# Altium PCB PCB1.PcbDoc
Units mil, origin at the board's own origin, x right, y up, seen from the top; angles counter-clockwise.
Board outline 6000 x 4000 mil, 2 copper layers (Top Layer, Bottom Layer); 59 components, 41 nets, 216 pads, 9 vias.
Unrouted connection lines stored in the file: 120.
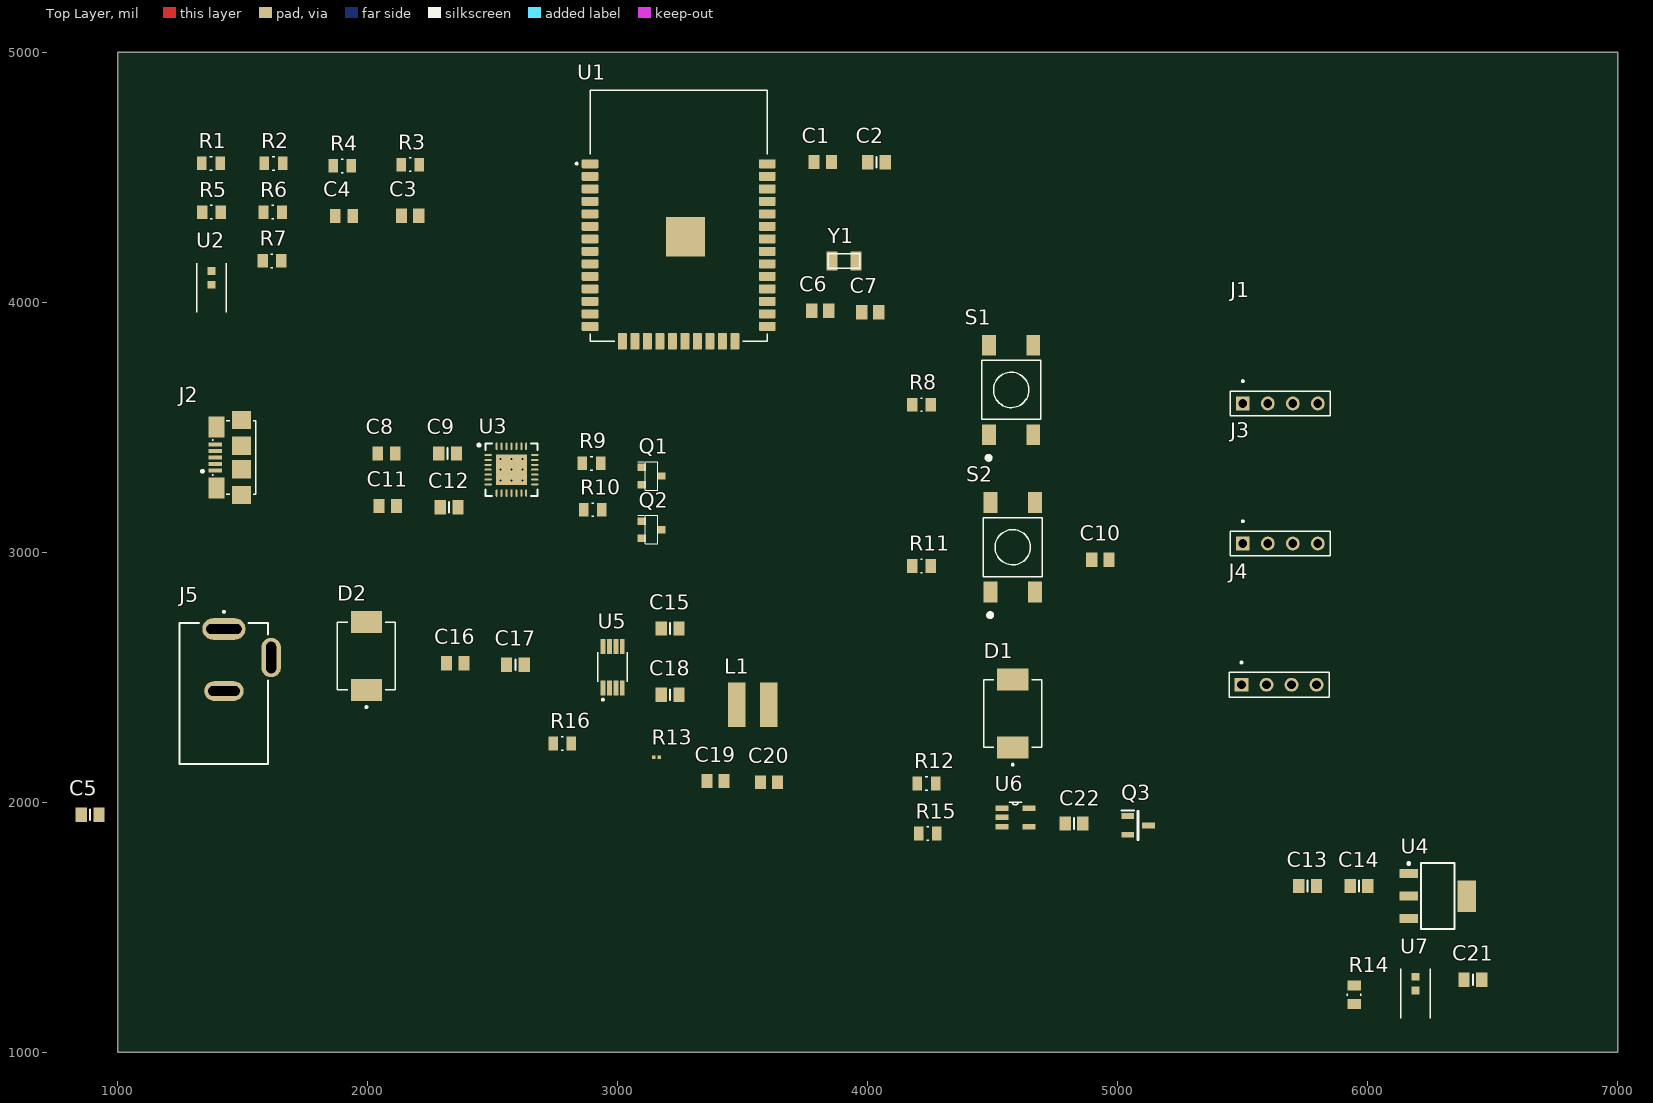
[diagram p0: Top Layer view]
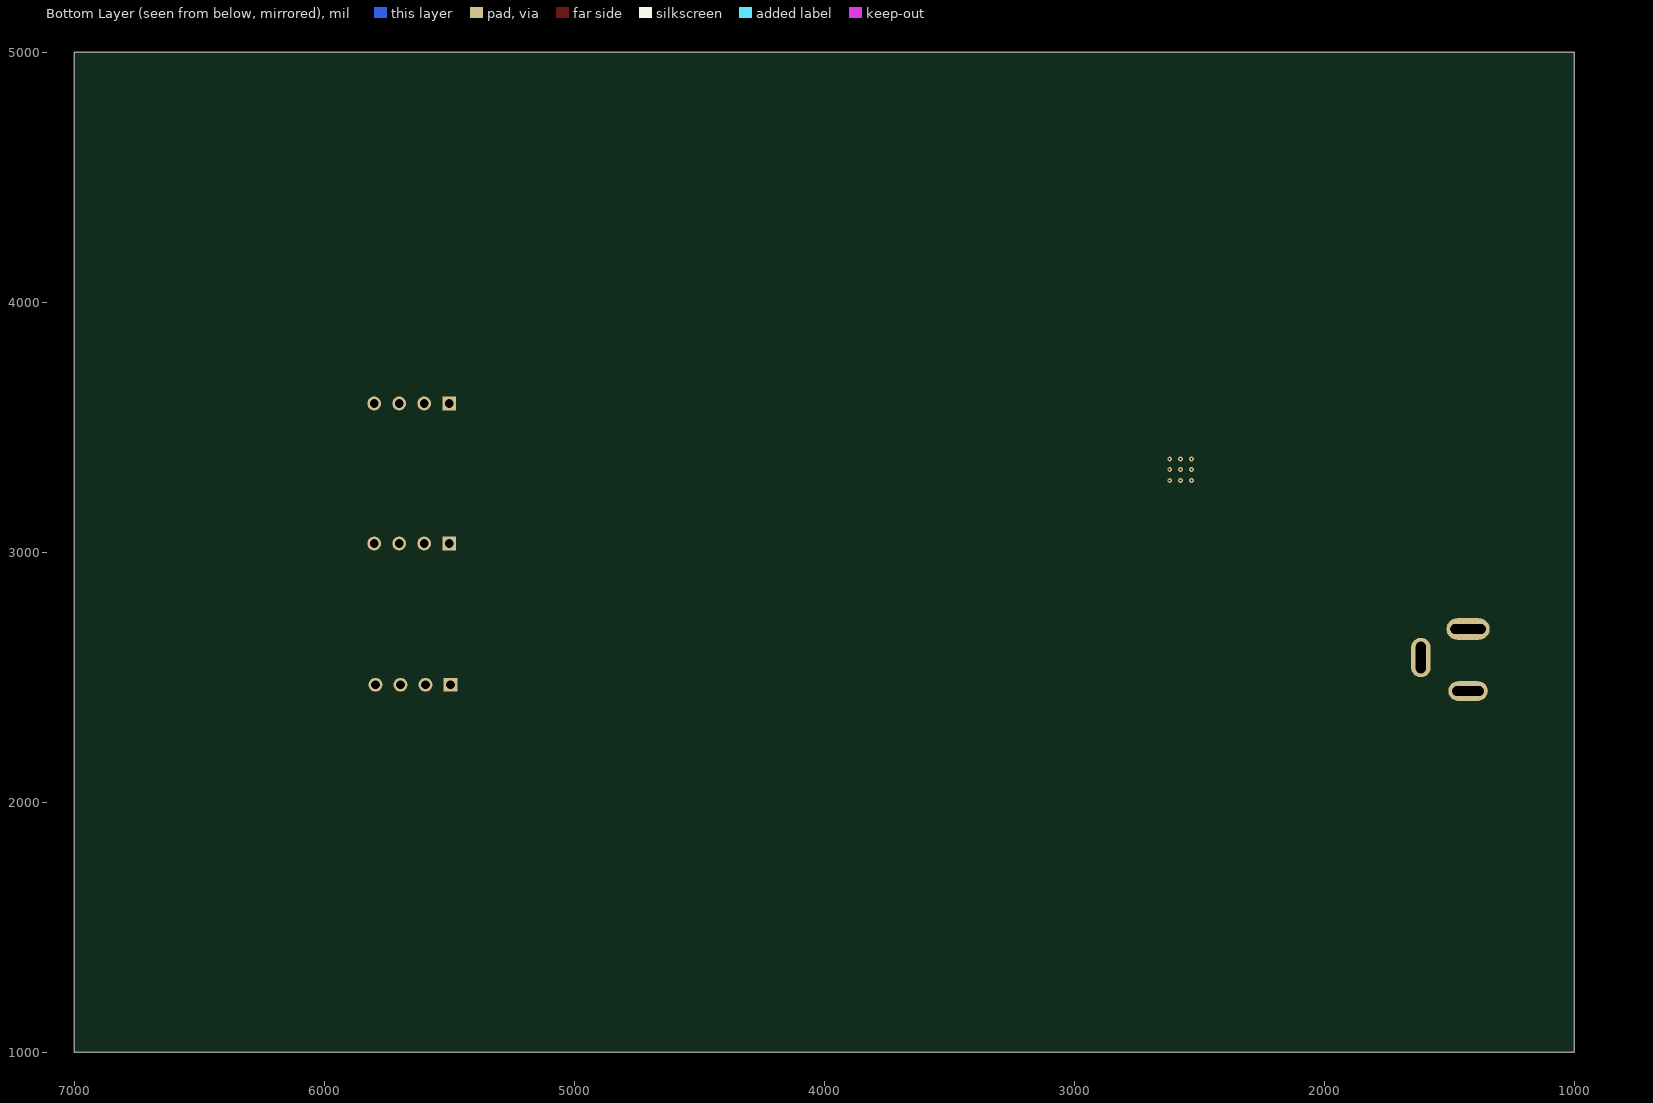
[diagram p1: Bottom Layer view, seen from below]

## Layer stack, top to bottom
Top Solder: solder mask 0.4, Solder Resist, Dk 3.5
Top Layer: signal copper 1.4
Dielectric 1: dielectric 12.6, FR-4, Dk 4.8
Bottom Layer: signal copper 1.4
Bottom Solder: solder mask 0.4, Solder Resist, Dk 3.5

## Board outline
1000,1000 7000,1000 7000,5000 1000,5000

## Design rules (kind name [scope] priority, off if disabled: settings)
Clearance [All] p1: gap=10 ignorepadtopadclearanceinfootprint=FALSE except(0: Arc-Hole Track-Hole SMDPad-Hole THPad-Hole Via-Hole Fill-Hole Poly-Hole Region-Hole Text-Hole)
PolygonConnect [All] p1: connectstyle=Relief reliefconductorwidth=10 reliefentries=4 polygonreliefangle="90 Angle" airgapwidth=10
RoomDefinition uARM [InComponentClass('uARM')] p1: confinementstyle=ConfineIn formatcopy=TRUE lockcomponents=FALSE outline 160,195 2160,195 2160,1195 160,1195
RoutingVias [All] p1: holewidth=28 width=50 viastyle="Through Hole" minholewidth=28 minwidth=50 maxholewidth=28 maxwidth=50
SolderMaskExpansion [All] p1: expansion=4 istentingtop=FALSE
Width [All] p1: maxlimit=10 minlimit=10 preferedwidth=10
30 further rules are at their usual default settings.

## Components (designator, comment, footprint, x,y, rotation, side; value= is the part's Value field where it differs from the comment)
C1 "JMK212ABJ106KG-T" CAPC2012X140N#1 3819.96,4560 r0 top value=10uF
C2 "08056D104KAT2A" CAPC2012X140N#2 4035,4560 r0 top value=0.1uF
C3 "08055C104KAT4A" CAPC2012X94N 2170,4345 r0 top value=0.1uF/50V
C4 "JMK212ABJ106KG-T" CAPC2012X140N#1 1905,4345 r0 top value=10uF
C5 "08056D104KAT2A" CAPC2012X140N#2 890,1950 r0 top value=0.1uF
C6 "C0805C270J5GACTU" CAPC2012X88N 3810,3965 r0 top value=27pF/50V
C7 "C0805C270J5GACTU" CAPC2012X88N 4010,3960 r0 top value=27pF/50V
C8 "JMK212ABJ106KG-T" CAPC2012X140N#1 2075,3395 r0 top value=10uF
C9 "LGC26D105MAT2S1" CAPC2012X140N#2 2320,3395 r0 top value=1uF
C10 "08055C104KAT4A" CAPC2012X94N 4930.35,2970 r0 top value=0.1uF/50V
C11 "JMK212ABJ106KG-T" CAPC2012X140N#1 2080,3185 r0 top value=10uF
C12 "LGC26D105MAT2S1" CAPC2012X140N#2 2325.43,3180 r0 top value=1uF
C13 "LGC26D105MAT2S1" CAPC2012X140N#2 5759.57,1665 r0 top value=1uF
C14 "08056D104KAT2A" CAPC2012X140N#2 5964.57,1665 r0 top value=0.1uF
C15 "LGC26D105MAT2S1" CAPC2012X140N#2 3209.57,2695 r0 top value=1uF
C16 "GRM21BR61H106KE43L" CAPC2012X145N 2350,2555 r0 top value=10uF/50V
C17 "08056D104KAT2A" CAPC2012X140N#2 2590.43,2550 r0 top value=0.1uF
C18 "08056D104KAT2A" CAPC2012X140N#2 3210,2430 r0 top value=0.1uF
C19 "CL21A106KAYNNNE" CAPC2012X135N 3391.02,2085 r0 top value=10uF/25V
C20 "CL21A106KAYNNNE" CAPC2012X135N 3605,2080 r0 top value=10uF/25V
C21 "LGC26D105MAT2S1" CAPC2012X140N#2 6420,1290 r0 top value=1uF
C22 "08056D104KAT2A" CAPC2012X140N#2 4825,1915 r0 top value=0.1uF
D1 "SS34" DIOM7959X265N 4580,2355 r90 top
D2 "SS34" DIOM7959X265N 1995,2585 r90 top
J1 "215297-4" TE_215297-4 5650,3595 r0 top
J2 "10118192-0001LF" AMPHENOL_10118192-0001LF 1390,3378.82 r90 top
J3 "215297-4" TE_215297-4 5650,3035 r0 top
J4 "215297-4" TE_215297-4 5645,2470 r0 top
J5 "DCJ235-05-A-XX-X_REVA" GCT_DCJ235-05-A-XX-X_REVA 1425,2435 r0 top
L1 "744773122" WE-PD2-S 3540,2390 r0 top
Q1 "SS8050-G" MBTB-T-SOT23 3135,3305 r0 top
Q2 "SS8050-G" MBTB-T-SOT23 3135,3090 r0 top
Q3 "IRLM6402" SOT95P237X112-3N 5081.34,1907.4 r0 top
R1 "ESR10EZPF1002" RESC2012X65N 1373.39,4555 r0 top value=10K/1%
R2 "ESR10EZPF1002" RESC2012X65N 1623.39,4555 r0 top value=10K/1%
R3 "ESR10EZPF1002" RESC2012X65N 2170,4550 r0 top value=10K/1%
R4 "ESR10EZPF1002" RESC2012X65N 1898.39,4545 r0 top value=10K/1%
R5 "ERJ-PB6B4700V" RESC2012X70N 1375,4360 r0 top value=470R
R6 "ERJ-PB6B4700V" RESC2012X70N 1620,4360 r0 top value=470R
R7 "ERJ-PB6B4700V" RESC2012X70N 1617.01,4165 r0 top value=470R
R8 "ERJ-PB6B4700V" RESC2012X70N 4215,3590 r0 top value=470R
R9 "ESR10EZPF1002" RESC2012X65N 2895,3355 r0 top value=10K/1%
R10 "ESR10EZPF1002" RESC2012X65N 2900,3170 r0 top value=10K/1%
R11 "ERJ-PB6B4700V" RESC2012X70N 4215,2945 r0 top value=470R
R12 "ESR10EZPF1002" RESC2012X65N 4235,2075 r0 top value=10K/1%
R13 "ERJ-1GEF5232C" RESC0603X26N 3155,2180 r0 top value=52K3
R14 "ERJ-PB6B4700V" RESC2012X70N 5945,1230 r90 top value=470R
R15 "ESR10EZPF1002" RESC2012X65N 4240,1875 r0 top value=10K/1%
R16 "ESR10EZPF1002" RESC2012X65N 2778.39,2235 r0 top value=10K/1%
S1 "5-1437565-0" SW_5-1437565-0 4573.58,3649.13 r90 top
S2 "5-1437565-0" SW_5-1437565-0 4580,3020 r90 top
U1 "ESP-WROOM-32" MODULE_ESP-WROOM-32 3243.66,4228.19 r0 top
U2 "SPMWHT541MP5WATMS4" LED_SPMWHT541MP5WAPKS4 1375,4058.07 r90 top
U3 "CP2109-A01-GM" SLAB-QFN-28-3125x3125TP_L 2575,3330 r0 top
U4 "TC1264-3.3VDBTR" SOT-223-DB3_L 6280,1625 r0 top
U5 "MCP16311T-E/MS" SOP65P490X110-8N 2980,2540 r90 top
U6 "MCP601T-E/OT" SOT95P270X145-5N 4590,1940 r0 top
U7 "SPMWHT541MP5WATMS4" LED_SPMWHT541MP5WAPKS4 6190,1235 r90 top
Y1 "ABS07-32.768KHZ-9-1-T" XTAL320X150X90 3905,4165 r0 top

## Footprints (in the part's own frame and the unit in brackets; to place one, negate y for a bottom-side part, rotate by r counter-clockwise, add the part's x,y. Pads: shape width x height; smd on the part's side, far side on the other; paste and mask are expansions set on the pad)
AMPHENOL_10118192-0001LF [mm]
  rect 0.4x1.35 smd: 1(-1.3,0) 2(-0.65,0) 3(0,0) 4(0.65,0) 5(1.3,0)
  rect 2.1x1.6 smd: SH1(-3.1,-0.125) SH2(3.1,-0.125)
  rect 1.8x1.9 smd: SH3(-3.8,-2.675) SH6(3.8,-2.675)
  rect 1.9x1.9 smd: SH4(-1.2,-2.675) SH5(1.2,-2.675)
  silkscreen extent -3.75,-4.13 3.75,1.4, body extent -3.95,-2.41 3.95,3.21, height 2.7
CAPC2012X88N [mm]
  rect 1.16x1.47 smd: 1(-0.875,0) 2(0.875,0)
  body extent -1,-0.63 1,0.63, height 0.88
CAPC2012X94N [mm]
  rect 1.16x1.47 smd: 1(-0.88,0) 2(0.88,0)
  body extent -1,-0.63 1,0.63, height 0.94
CAPC2012X135N [mm]
  rect 1.1x1.38 smd: 1(-0.863,0) 2(0.863,0)
  body extent -1,-0.63 1,0.63, height 1.35
CAPC2012X140N#1 [mm]
  rect 1.1x1.43 smd: 1(-0.888,0) 2(0.888,0)
  body extent -1,-0.63 1,0.63, height 1.4
CAPC2012X140N#2 [mm]
  rect 1.15x1.45 smd: 1(-0.9,0) 2(0.9,0)
  silkscreen extent 0,-0.55 0,0.55, body extent -1.02,-0.65 1.02,0.65, height 1.2
CAPC2012X145N [mm]
  rect 1.11x1.47 smd: 1(-0.9,0) 2(0.9,0)
  body extent -1,-0.63 1,0.63, height 1.45
DIOM7959X265N [mm]
  rect 2.25x3.18 smd: A(3.455,0) C(-3.455,0)
  silkscreen extent -5.3,-2.95 3.44,2.95, body extent -3.98,-2.95 3.98,2.95, height 1.2
GCT_DCJ235-05-A-XX-X_REVA [mm]
  oval 4.4x2.2 hole 1 slot 3.6 at 0 deg: 1(0,6.55)
  oval 4x2 hole 1 slot 3.2 at 0 deg: 2(0,0.25)
  oval 2x4 hole 1 slot 3.2 at 90 deg: 3(4.8,3.65)
  silkscreen extent -4.5,-7.15 4.5,8.4
LED_SPMWHT541MP5WAPKS4 [mm]
  rect 0.8x0.8 smd paste-1 mask+0: A(1.7,0) C(0.3,0)
  silkscreen extent -2.5,-1.5 2.5,1.5, body extent -2.8,-1.5 2.8,1.5, height 0.8
MBTB-T-SOT23 [mm]
  rect 0.85x0.75 smd: 1(-1,0.875) 2(-1,-0.875) 3(1,0)
  silkscreen extent -1.38,-1.45 0.65,1.45
MODULE_ESP-WROOM-32 [mm]
  rrect22% 1.7x0.9 smd: 1(-9,8.255) 2(-9,6.985) 3(-9,5.715) 4(-9,4.445) 5(-9,3.175) 6(-9,1.905) 7(-9,0.635) 8(-9,-0.635) 9(-9,-1.905) 10(-9,-3.175) 11(-9,-4.445) 12(-9,-5.715) 13(-9,-6.985) 14(-9,-8.255) 25(9,-8.255) 26(9,-6.985) 27(9,-5.715) 28(9,-4.445) 29(9,-3.175) 30(9,-1.905) 31(9,-0.635) 32(9,0.635) 33(9,1.905) 34(9,3.175) 35(9,4.445) 36(9,5.715) 37(9,6.985) 38(9,8.255)
  rect 4x4 smd: 1.1(0.7,0.845)
  rrect22% 0.9x1.7 smd: 15(-5.715,-9.755) 16(-4.445,-9.755) 17(-3.175,-9.755) 18(-1.905,-9.755) 19(-0.635,-9.755) 20(0.635,-9.755) 21(1.905,-9.755) 22(3.175,-9.755) 23(4.445,-9.755) 24(5.715,-9.755)
  silkscreen extent -10.46,-9.75 9,15.75, body extent -9,-12.75 9,12.75, height 3.25
RESC0603X26N [mm]
  rect 0.38x0.4 smd: 1(-0.281,0) 2(0.281,0)
  body extent -0.3,-0.15 0.3,0.15, height 0.26
RESC2012X65N [mm]
  rect 0.97x1.38 smd: 1(-0.93,0) 2(0.93,0)
  silkscreen extent -0.12,-0.68 0.12,0.68, body extent -1,-0.63 1,0.63, height 0.65
RESC2012X70N [mm]
  rect 1.04x1.38 smd: 1(-0.94,0) 2(0.94,0)
  silkscreen extent -0.1,-0.68 0.1,0.68, body extent -1,-0.63 1,0.63, height 0.7
SLAB-QFN-28-3125x3125TP_L [mm] "QFN, 28-Leads, Body 5x5mm, Pitch 0.5mm, Thermal Pad 3.13x3.13mm, IPC High Density"
  oval 0.75x0.2 smd: 1(-2.375,1.5) 2(-2.375,1) 3(-2.375,0.5) 4(-2.375,0) 5(-2.375,-0.5) 6(-2.375,-1) 7(-2.375,-1.5) 15(2.375,-1.5) 16(2.375,-1) 17(2.375,-0.5) 18(2.375,0) 19(2.375,0.5) 20(2.375,1) 21(2.375,1.5)
  oval 0.2x0.75 smd: 8(-1.5,-2.375) 9(-1,-2.375) 10(-0.5,-2.375) 11(0,-2.375) 12(0.5,-2.375) 13(1,-2.375) 14(1.5,-2.375) 22(1.5,2.375) 23(1,2.375) 24(0.5,2.375) 25(0,2.375) 26(-0.5,2.375) 27(-1,2.375) 28(-1.5,2.375)
  rect 3.13x3.13 smd: 29(0,0)
  silkscreen extent -3.42,-2.65 2.65,2.65, body extent -2.5,-2.5 2.5,2.5, height 1
SOP65P490X110-8N [mm]
  rect 1.5x0.49 smd: 1(-2.105,0.975) 2(-2.105,0.325) 3(-2.105,-0.325) 4(-2.105,-0.975) 5(2.105,-0.975) 6(2.105,-0.325) 7(2.105,0.325) 8(2.105,0.975)
  silkscreen extent -3.4,-1.5 1.5,1.5
SOT95P237X112-3N [mm]
  rect 1.3x0.6 smd: 1(-1.05,0.95) 2(-1.05,-0.95) 3(1.05,0)
  silkscreen extent -1.7,-1.46 0.05,1.5, body extent -1.18,-1.46 1.18,1.46, height 1.12
SOT95P270X145-5N [mil]
  rect 52x22 smd: 1(-54,37) 2(-54,0) 3(-54,-37) 4(54,-37) 5(54,37)
  silkscreen extent -25,49 25,61, body extent -57,-53 57,53, height 57
SOT-223-DB3_L [mm] "SOT223, 4-Leads, Body 6.5x3.5mm, Pitch 2.3mm, Lead Span 7mm, IPC High Density"
  rect 1.9x0.9 smd: 1(-2.95,2.3) 2(-2.95,0) 3(-2.95,-2.3)
  rect 1.9x3.2 smd: 4(2.95,0)
  silkscreen extent -3.07,-3.35 1.7,3.42, body extent -1.85,-3.35 1.85,3.35, height 1.8
SW_5-1437565-0 [mm]
  rect 2.1x1.4 smd: 1(-4.55,2.25) 2(4.55,2.25) 3(-4.55,-2.25) 4(4.55,-2.25)
  silkscreen extent -7.1,-3 3,3, body extent -3,-5 3,5, height 7.26
TE_215297-4 [mm]
  rect 1.408x1.408 hole 0.9: 1(-3.81,0)
  round 1.408 hole 0.9: 2(-1.27,0) 3(1.27,0) 4(3.81,0)
  silkscreen extent -5.08,-1.26 5.08,2.36, body extent -5.08,0 5.08,10, height 1.26
WE-PD2-S [mm] "SMD Inductor, 2-Leads, Body 4.5 x 4.0 mm"
  rect 1.75x4.5 smd: 1(-1.625,0) 2(1.625,0)
  body extent -2.23,-2 2.23,2, height 3.17
XTAL320X150X90 [mil]
  rect 43x75 smd: 1(-48,0) 2(48,0)
  silkscreen extent -63,-30 63,30, body extent -63,-30 63,30, height 35

## Part data
C1 C4 C8 C11: "CAP CER 10UF 6.3V X5R 0805", Package=None, Availability=Unavailable, MF="{'manufacturer': u'Taiyo Yuden'}", MP=JMK212ABJ106KG-T, Price=None
C2 C5 C14 C17 C18 C22: "CAP 0.1UF 6.3VDC X5R 10% SMD 0805", Package=None, Availability=Unavailable, MF="{'manufacturer': u'AVX'}", MP=08056D104KAT2A, Price=None
C3 C10: ".1UF 50V 10% 0805", Package=None, Availability=Unavailable, MF="{'manufacturer': u'AVX'}", MP=08055C104KAT4A, Price=None
C6 C7: "Ceramic Multilayer Capacitor; Capacitor Type:General Purpose; Capacitance:27pF; Capacitance Tolerance:Â± 5%; Voltage Rating:50V; Capacitor Dielectric Type:Multilayer Ceramic; Package/Case:0805; Termination Type:SMD ;RoHS Compliant: Yes", Package=None, Availability=Unavailable, MF="{'manufacturer': u'KEMET'}", MP=C0805C270J5GACTU, Price=None
C9 C12 C13 C15 C21: "CAP CER 1UF 6.3V X5R 0805", Package=None, Availability=Unavailable, MF="{'manufacturer': u'AVX'}", MP=LGC26D105MAT2S1, Price=None
C16: "SMD Capacitor X5R(EIA) with Capacitance: 10uF Tol. 10%. Rated Voltage: 50Vdc", Package=None, Availability=Unavailable, MF="{'manufacturer': u'Murata Electronics'}", MP=GRM21BR61H106KE43L, Price=None
C19 C20: "Cap Ceramic 10uF 25V X5R 10% SMD 0805 85Â°C Embossed T/R", Package=None, Availability=Unavailable, MF="{'manufacturer': u'Samsung'}", MP=CL21A106KAYNNNE, Price=None
D1 D2: "Diode Schottky 40V 3A 2-Pin SMC T/R", Package=None, Availability=Unavailable, MF="{'manufacturer': u'ON Semiconductor'}", MP=SS34, Price=None
J1 J3 J4 R5 R6 R7 R8 R11 R14 U2 U6 U7: Package=None, Availability=Unavailable, Price=None
  J1 J3 J4: MF="{'manufacturer': u'TE Connectivity'}", MP=215297-4
  R5 R6 R7 R8 R11 R14: MF="{'manufacturer': u'Panasonic'}", MP=ERJ-PB6B4700V
  U2 U7: MF="{'manufacturer': u'Samsung Semiconductor,'}", MP=SPMWHT541MP5WATMS4
  U6: MF="{'manufacturer': u'Microchip'}", MP=MCP601T-E/OT
J2: "Single Port 5 Contact Horizontal Right Angle Shielded Micro B USB 2.0 Connector", Package=None, Availability=Unavailable, MF="{'manufacturer': u'FCI'}", MP=10118192-0001LF, Price=None
J5: "DC Power Jack, Thru-Hole, Horizontal, with Locating Pegs, D2.35mm", Package=None, Availability=Unavailable, MF="{'manufacturer': u'Global Connector Technology'}", MP=DCJ235-05-A-XX-X_REVA, Price=None
L1: "SMD Power Inductor WE-PD2, L = 22.0 µH", Inductance="22.0 µH", ComponentLink1Description="Manufacturer Link", ComponentLink1URL=http://www.we-online.com, ComponentLink2Description=Datasheet, ComponentLink2URL=http://www.we-online.de/katalog/media/pdf/744773122.pdf, DatasheetVersion="ver 1, Oct-2004", PackageDescription="SMD Inductor, 2-Leads, Body 4.5 x 4.0 mm", PackageReference=WE-PD2-S, PackageVersion=2004, PartNumber=744773122
Q1 Q2: "<b>Bipolar Transistors - BJT NPN TRANSISTOR 1.5A 40V</b><p> Source: <a href=\"https://componentsearchengine.com/Datasheets/1/SS8050-G.pdf\"> Datasheet </a>", Package=None, Availability=Unavailable, MF="{'manufacturer': u'Comchip Technology'}", MP=SS8050-G, Price=None
Q3: "MOSFET (P-Channel)", Manufacturer_Name=Infineon, Datasheet Link=https://www.kynix.com/Detail/613549/IRLM6402.html, Height=1.12mm, Manufacturer_Part_Number=IRLM6402
R1 R2 R3 R4 R9 R10 R12 R15 R16: "RES SMD 10K OHM 1% 0.4W 0805", Package=None, Availability=Unavailable, MF="{'manufacturer': u'Rohm'}", MP=ESR10EZPF1002, Price=None
R13: "Res Thick Film 0201 52.3K Ohm 1% 0.05W(1/20W) Â±200ppm/C SMD T/R", Package=None, Availability=Unavailable, MF="{'manufacturer': u'Panasonic'}", MP=ERJ-1GEF5232C, Price=None
S1 S2: "Switch Tactile OFF (ON) Round Button Gull Wing 0.05A 12VDC 1.57N SMD T/R", Package=None, Availability=Unavailable, MF="{'manufacturer': u'TE Connectivity'}", MP=5-1437565-0, Price=None
U1: "Module: combo; GPIO, I2C x2, I2S x2, SDIO, SPI x3, UART x3; 19.5dBm", Package=None, Availability=Unavailable, MF="{'manufacturer': u'Espressif Systems'}", MP=ESP-WROOM-32, Price=None
U3: "Single-Chip USB to UART Bridge, 1024 Bytes EEPROM, -40 to 85 degC, 28-pin QFN, Tube", Manufacturer="Silicon Labs", Code_IPC=J-STD-020C, Code_JEDEC=MO-220, ComponentLink1Description="Manufacturer URL", ComponentLink1URL=http://www.silabs.com/, ComponentLink2Description=Datasheet, ComponentLink2URL=http://www.silabs.com/Support%20Documents/TechnicalDocs/CP2102-9.pdf, ComponentLink3Description="Package Specification", ComponentLink3URL=http://www.silabs.com/Support%20Documents/TechnicalDocs/C8051T61x.pdf, DatasheetVersion="Rev. 1.5", EEPROM="1024 Bytes", Internal Oscillator=TRUE, Mounting Technology="Surface Mount", PackageDescription="28-Pin Quad-Flat No-Leads Package, Body 5 x 5 mm, Pitch 0.5 mm", PackageReference=QFN-28, PartNumber=CP2109-A01-GM, Sub-Family="USB Bridges"
U4: "800 mA Fixed-Output CMOS LDO with Shutdown, 3-Pin SOT-223, Extended Temperature, Tape and Reel", DatasheetVersion="revC, Oct-2006", PackageDescription="3-Lead Plastic Small Outline Transistor (DB) [SOT-223]", PackageReference=SOT-223-DB3, PackageVersion="revBB, Aug-2009", PartNumber=TC1264-3.3VDBTR
U5: "The MCP16311/2 is a compact, high-efficiency, fixed frequency, synchronous step-down DC-DC converter in an 8-pin MSOP, or 2 x 3 TDFN package that operates from input voltage sources up to 30V. Integrated features include a high-side and a low-side switch, fixed frequency peak current mode control, internal compensation, peak current limit and overtemperature protection. The MCP16311/2 provides all the active functions for local DC-DC conversion, with fast transient response and accurate regulation.", Package=None, Availability=Unavailable, MF="{'manufacturer': u'Microchip Technology'}", MP=MCP16311T-E/MS, Price=None
Y1: "ABS07 Series 32.768 kHz Â±20 ppm 12.5 pF -40 to +85 C SMT Low Profile Crystal", Package=None, Availability=Unavailable, MF="{'manufacturer': u'Abracon'}", MP=ABS07-32.768KHZ-9-1-T, Price=None

## Via types
v1: diameter 19.68, hole 7.87, Top Layer to Bottom Layer, 9 vias

## Nets (pads, with @x,y where several pads share a name; then routed paths per layer and width w, separated by ;. In a path a pad name is that pad's centre, name@x,y a point inside that pad or via, vN(x,y) a via of type N, cw(c..) or ccw(c..) an arc to the next point about the centre after c; other vN are vias at no path point)
+5: C13.1 C14.2 C19.2 C20.2 C22.1 D1.C L1.2 Q3.2 R13.2 U4.1 U6.5
D+: J2.3 U3.4
D-: J2.2 U3.5
DTR: Q2.3 R9.1 U3.28
EN: C3.2 Q1.2 R3.1 R8.1
GND: C1.1 C2.2 C3.1 C4.1 C6.1 C7.1 C8.1 C9.2 C10.1 C11.1 C12.2 C13.2 C14.1 C15.2 C16.1 C17.1 C19.1 C20.1 C21.2 C22.2 J1.1 J2.5 J3.1 J4.1 J5.2 J5.3 R16.1 S1.3 S2.3 U1.1 U1.1.1 U1.15 U1.38 U3.3 U3.29 U4.2 U4.4 U5.5 U5.8
  other v1: 2531.69,3286.69 2575,3286.69 2618.31,3286.69 2531.69,3330 2575,3330 2618.31,3330 2531.69,3373.31 2575,3373.31 2618.31,3373.31
IO0: Q2.2 R1.1 R2.1 U1.25
IO2/DATA0: R2.2 U1.24
IO5: J1.3 U1.29
IO13: J1.4 U1.16
IO14/CLK: J3.4 U1.13
IO16/U2RXD: J4.4 U1.27
IO18: R11.1 U1.30
IO19: J4.3 U1.31
IO23: J3.3 U1.37
NetC4_2: C4.2 R4.1 U1.3
NetC6_2: C6.2 U1.9
NetC7_2: C7.2 Y1.2
NetC10_2: C10.2 R11.2 S2.1
NetC15_1: C15.1 U5.2
NetC18_1: C18.1 U5.7
NetC18_2: C18.2 L1.1 U5.6
NetD2_A: D2.A J5.1
NetQ1_1: Q1.1 R9.2
NetQ2_1: Q2.1 R10.2
NetQ3_1: Q3.1 U6.1
NetR7_2: R7.2
NetR8_2: R8.2 S1.1
NetR12_1: R12.1 R15.2 U6.3
NetR13_1: R13.1 R16.2 U5.1
NetR14_1: R14.1
NetR15_1: R15.1 U6.2
NetU1_8: U1.8 Y1.1
RTS: Q1.3 R10.1 U3.24
RXD: R5.1 U1.34
RXD_CP2109: R6.2 U3.25
TXD: R6.1 U1.35
TXD_CP2109: R5.2 U3.26
VCC: C8.2 C9.1 D1.A J1.2 J2.1 J3.2 J4.2 Q3.3 U3.8
VDD33: C1.2 C2.1 C11.2 C12.1 C21.1 R1.2 R3.2 R4.2 R7.1 R14.2 U1.2 U3.6 U3.7 U4.3 U6.4
VIN: C16.2 C17.2 D2.C R12.2 U5.3 U5.4
pads on no net: C5.1 C5.2 J2.4 J2.SH1 J2.SH2 J2.SH3 J2.SH4 J2.SH5 J2.SH6 S1.2 S1.4 S2.2 S2.4 U1.4 U1.5 U1.6 U1.7 U1.10 U1.11 U1.12 U1.14 U1.17 U1.18 U1.19 U1.20 U1.21 U1.22 U1.23 U1.26 U1.28 U1.32 U1.33 U1.36 U2.A U2.C U3.1 U3.2 U3.9 U3.10 U3.11 U3.12 U3.13 U3.14 U3.15 U3.16 U3.17 U3.18 U3.19 U3.20 U3.21 U3.22 U3.23 U3.27 U7.A U7.C

## Text inside footprints (layer, text, board x,y; h text height)
J2: Mechanical 13 "PCB Edge" at 1666.34,3215.63 h32.03 r90